# Altium PCB PCB_Kocka_V2.0_ARM.PcbDoc
Units mil, origin at the board's own origin, x right, y up, seen from the top; angles counter-clockwise.
Board outline 1968.5 x 1968.5 mil, 2 copper layers (Top Layer, Bottom Layer); 44 components, 42 nets, 195 pads, 61 vias.
Unrouted connection lines stored in the file: 1.
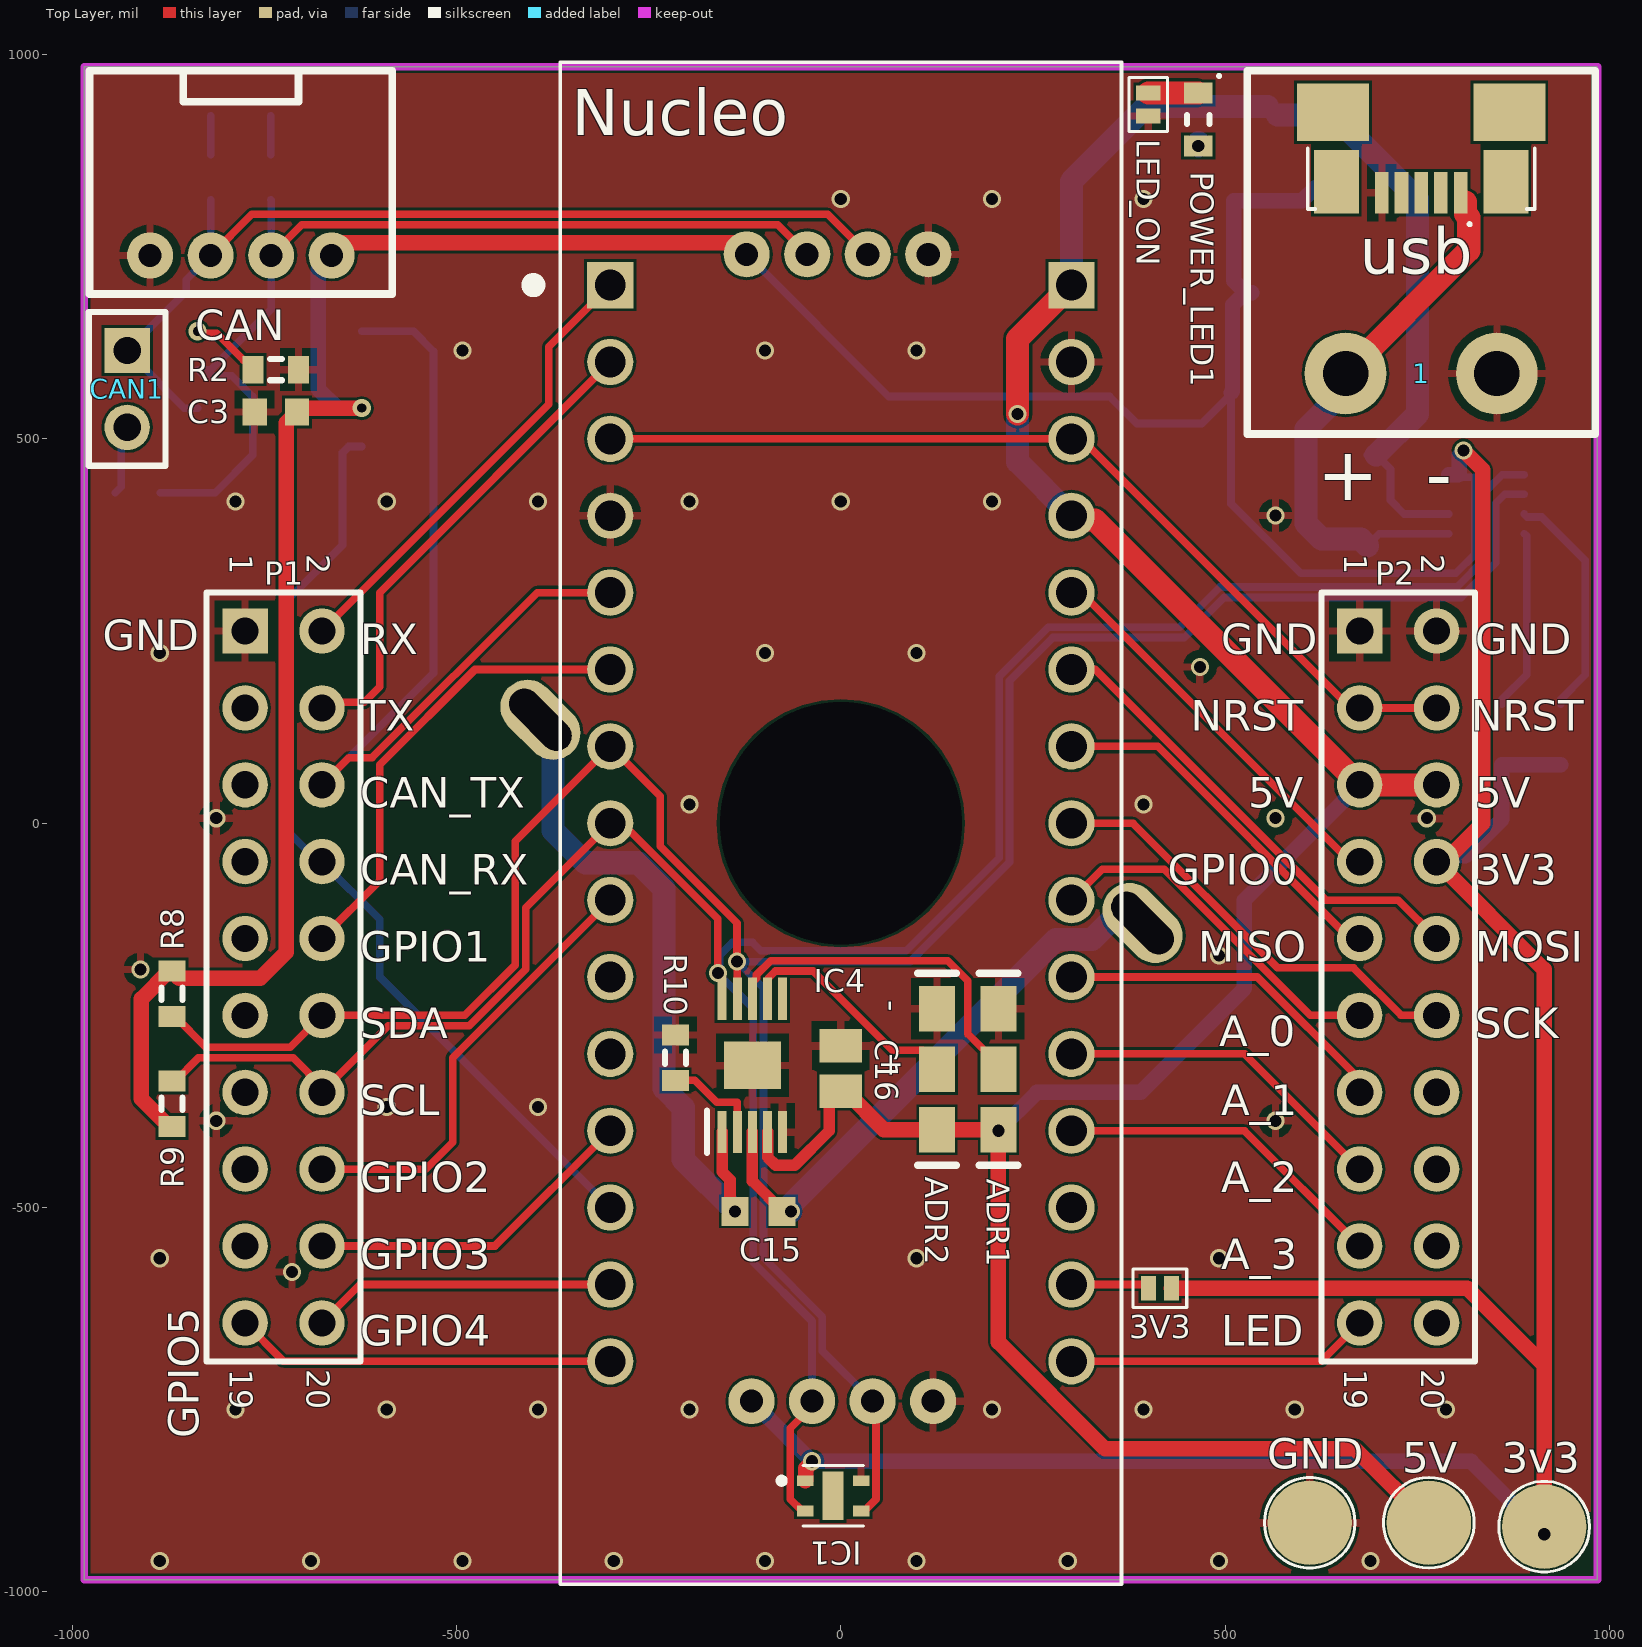
[diagram p0: Top Layer view]
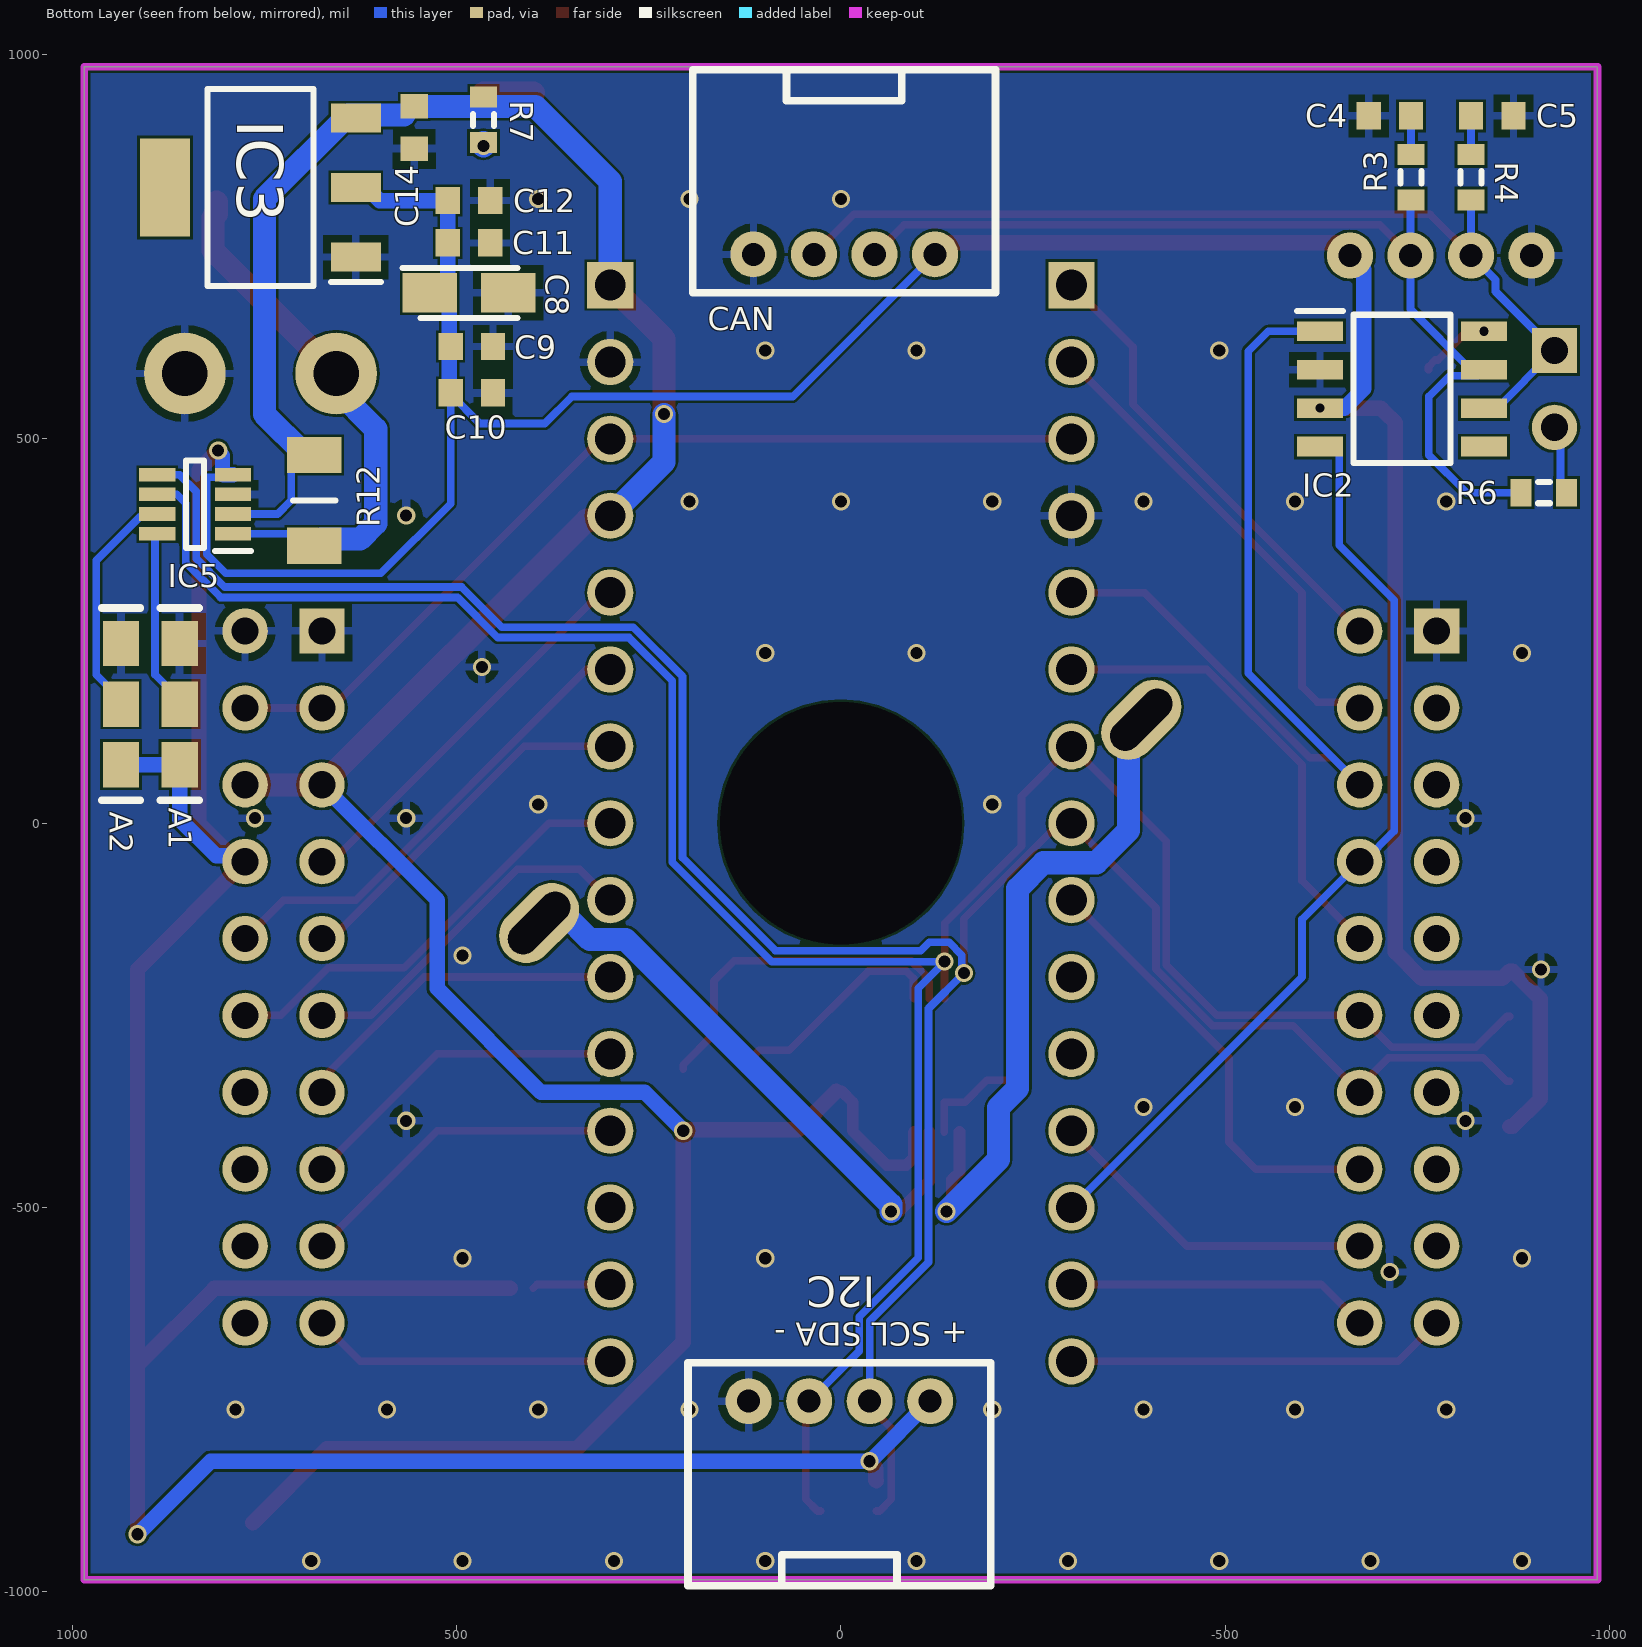
[diagram p1: Bottom Layer view, seen from below]

## Layer stack, top to bottom
Top Solder: solder mask 0.4, Solder Resist, Dk 3.5
Top Layer: signal copper 1.4
Dielectric 1: dielectric 12.6, FR-4, Dk 4.8
Bottom Layer: signal copper 1.4
Bottom Solder: solder mask 0.4, Solder Resist, Dk 3.5

## Board outline
-984.25,-984.25 -984.25,984.25 984.25,984.25 984.25,-984.25

## Design rules (kind name [scope] priority, off if disabled: settings)
Clearance [All] p1: gap=3.5 ignorepadtopadclearanceinfootprint=FALSE except(5: Arc-Via Track-Via)
ComponentClearance [All] p1: gap=7.87 collisioncheckmode=3 verticalgap=10 showdistances=FALSE
HoleSize [All] p1: absolutevalues=TRUE maxlimit=248.03 minlimit=7.87 maxpercent=80.000 minpercent=20.000
HoleToHoleClearance [All] p1: gap=1 allowstackedmicrovias=TRUE
MatchedLengths [All] p1: tolerance=1000 checknetsindiffpair=TRUE checkdiffpairvsdiffpair=FALSE checkxsignals=FALSE checkothers=FALSE
MinimumSolderMaskSliver [All] p1: minsoldermaskwidth=1
PolygonConnect [All] p1: connectstyle=Relief reliefconductorwidth=10 reliefentries=4 polygonreliefangle="90 Angle" airgapwidth=10
RoutingVias [All] p1: holewidth=11.81 width=23.62 viastyle="Through Hole" minholewidth=7.87 minwidth=17.72 maxholewidth=248.03 maxwidth=393.7
SilkToSilkClearance [All] p1: silktosilkclearance=0
SilkToSolderMaskClearance [IsPad] p1: minsilkscreentomaskgap=0 clearancetoexposedcopper=TRUE
SolderMaskExpansion [All] p1: expansion=4
Width [All] p1: maxlimit=500 minlimit=3.5 preferedwidth=10
24 further rules are at their usual default settings.

## Components (designator, comment, footprint, x,y, rotation, side; value= is the part's Value field where it differs from the comment)
1 "CON_2CH_PLUG" CON_2CH_PLUG 755,585 r180 top
3V3 "JMP" JMP 415,-605 r0 top
3v3 "3V3" 1508000150000030 915,-915 r0 top (schematic designator 3V3)
5V "5V" 1508000150000030 765,-910 r90 top
A1 "ADR_PAD" SOLDER_PAD 860,155 r180 bottom
A2 "ADR_PAD" SOLDER_PAD 936.42,155 r180 bottom
ADR1 "ADR_PAD" SOLDER_PAD 205,-320 r180 top
ADR2 "ADR_PAD" SOLDER_PAD 125,-320 r180 top
C3 "0,1uF" 1608[0603] -735,535 r180 top value=100pF
C4 "560pF" 1608[0603] -714.25,920.25 r0 bottom value=100pF
C5 "560pF" 1608[0603] -847.38,920.25 r180 bottom value=100pF
C8 "10uF" CAPPM3216X180N 483.74,690 r180 bottom
C9 "4,7uF" 1608[0603] 480,620 r180 bottom value=100pF
C10 "4,7uF" 1608[0603] 480,560 r180 bottom value=100pF
C11 "4,7uF" 1608[0603] 483.74,755 r180 bottom value=100pF
C12 "4,7uF" 1608[0603] 483.74,810 r180 bottom value=100pF
C14 "100nF" 1608[0603] 555,905 r270 bottom value=100pF
C15 "100nF" Capacitor -107.01,-505 r180 top
C16 "10uF" C0805 0,-319.09 r90 top
CAN "JST-4-ANGLE" JST-4-ANGLE -4.37,740 r180 bottom
CAN "JST-4-ANGLE" JST-4-ANGLE -780.45,738.54 r0 top
CAN1 "Header 2" HDR1X2 -928.37,615 r270 top
GND "5V" 1508000150000030 610,-910 r0 top
I2C "JST-4-ANGLE" JST-4-ANGLE 1.89,-751.82 r0 bottom
IC1 "SHTC3" SHTC3 -25.75,-875 r270 top
IC2 "MCP2551-I_SN" SOIC127P600X175-8N -730,565 r180 bottom
IC3 "LD1117S33TR" SOT230P700X180-4N 755,827 r0 bottom
IC4 "DRV8830DGQR" SOP50P490X110-11N -115,-315 r90 top
IC5 "INA219AIDCNR" SOT65P280X145-8N 840,415 r0 bottom
LED_ON "JMP" JMP 400,935 r90 top
Nucleo "Nucleo_32" Nucleo_32 0,0 r0 top
P1 "Header 10X2" HDR2X10 -775,250 r270 top
P2 "Header 10X2" HDR2X10 675,250 r270 top
POWER_LED1 "LED" LED5mA 465,915.55 r90 top
R2 "4,7K" J1-0603 -735,590 r0 top value=3,3k
R3 "100R" J1-0603 -741.81,840.25 r270 bottom value=3,3k
R4 "100R" J1-0603 -819.82,840.25 r270 bottom value=3,3k
R6 "120R" J1-0603 -914.53,430 r0 bottom value=3,3k
R7 "430R" J1-0603 465,915 r270 bottom
R8 "4K7" J1-0603 -870,-221.92 r90 top value=1K5
R9 "4K7" J1-0603 -870,-365 r270 top value=1K5
R10 "0R2" J1-0603 -215,-305 r270 top
R12 "2mOhm" RESC3216X75N 685,420 r270 bottom
usb "micro USB" "micro USB" 755,925 r180 top

## Footprints (in the part's own frame and the unit in brackets; to place one, negate y for a bottom-side part, rotate by r counter-clockwise, add the part's x,y. Pads: shape width x height; smd on the part's side, far side on the other; paste and mask are expansions set on the pad)
1608[0603] [mm] "Chip Capacitor, Body 1.6x0.8mm, IPC High Density"
  rect 0.8x0.9 smd: 1(-0.7,0) 2(0.7,0)
  body extent -0.87,-0.48 0.87,0.48, height 1.3
1508000150000030 [mil]
  round 110 smd: 1(0,0)
  silkscreen extent -59,-59 59,59
C0805 [mm] "Chip Capacitor, Body 2.0x1.3mm, IPC High Density"
  rect 1.1x1.4 smd: 1(-0.75,0) 2(0.75,0)
  body extent -1.1,-0.72 1.1,0.72, height 1.4
Capacitor [mm]
  rect 0.9x0.95 smd: 1(-0.775,0) 2(0.775,0)
  body extent -0.8,-0.4 0.8,0.4, height 0.5
CAPPM3216X180N [mm]
  rect 1.8x1.3 smd: 1(-1.3,0) 2(1.3,0)
  silkscreen extent -2.2,-0.82 1.6,0.82, body extent -1.6,-0.83 1.6,0.83, height 1.8
CON_2CH_PLUG [mm] "TBG-5.0-KW-2P"
  round 2.7 hole 1.5: 1(-2.5,0) 2(2.5,0)
  silkscreen extent -5.75,-10 5.75,2, body extent -6,-10.1 6,1.91, height 8.5
HDR1X2 [mm] "Connector; Header; 2 Position"
  rect 1.5x1.5 hole 0.9: 1(0,0)
  round 1.5 hole 0.9: 2(2.54,0)
  silkscreen extent -1.27,-1.27 3.81,1.27
HDR2X10 [mm] "Connector; Header; 10x2 Position"
  rect 1.5x1.5 hole 0.9: 1(0,0)
  round 1.5 hole 0.9: 2(0,2.54) 3(2.54,0) 4(2.54,2.54) 5(5.08,0) 6(5.08,2.54) 7(7.62,0) 8(7.62,2.54) 9(10.16,0) 10(10.16,2.54) 11(12.7,0) 12(12.7,2.54) 13(15.24,0) 14(15.24,2.54) 15(17.78,0) 16(17.78,2.54) 17(20.32,0) 18(20.32,2.54) 19(22.86,0) 20(22.86,2.54)
  silkscreen extent -1.27,-1.27 24.13,3.81
J1-0603 [mm] "Chip Resistor, Body 1.6x0.8mm, IPC High Density"
  rect 0.7x0.9 smd: 1(-0.75,0) 2(0.75,0)
  silkscreen extent -0.2,-0.35 0.2,0.35, body extent -0.85,-0.48 0.85,0.48, height 0.9
JMP [mm] "Jumper_solder"
  rect 0.5x0.8 smd: 1(-0.381,0) 2(0.381,0)
  silkscreen extent -0.89,-0.64 0.89,0.64
JST-4-ANGLE [mil] "NXW-04K"
  round 60 hole 30: 1(-118.11,0) 2(-39.37,0) 3(39.37,0) 4(118.11,0)
  silkscreen extent -197,-50 197,240, body extent -195,-55 195,245, height 189
LED5mA [mm]
  rect 0.7x0.95 smd: 1(-0.875,0) 2(0.875,0)
  silkscreen extent -0.15,-0.74 1.49,0.38, body extent -0.8,-0.4 0.8,0.4, height 0.6
"micro USB" [mm]
  rect 0.45x1.38 smd: 1(-1.3,2.66) 2(-0.65,2.66) 3(0,2.66) 4(0.65,2.66) 5(1.3,2.66)
  rect 1.475x2.1 smd: SH1(-2.8,2.3) SH2(2.8,2.3)
  rect 2.375x1.9 smd: SH3(-2.913,0) SH6(2.913,0)
  silkscreen extent -3.75,1.2 3.75,3.75, body extent -3.99,-2.78 3.99,2.65, height 2.69
Nucleo_32 [mm]
  rect 1.53x1.53 hole 1.02: 3.1(-7.62,17.78) 4.1(7.62,17.78)
  round 1.53 hole 1.02: 3.2(-7.62,15.24) 3.3(-7.62,12.7) 3.4(-7.62,10.16) 3.5(-7.62,7.62) 3.6(-7.62,5.08) 3.7(-7.62,2.54) 3.8(-7.62,0) 3.9(-7.62,-2.54) 3.10(-7.62,-5.08) 3.11(-7.62,-7.62) 3.12(-7.62,-10.16) 3.13(-7.62,-12.7) 3.14(-7.62,-15.24) 3.15(-7.62,-17.78) 4.2(7.62,15.24) 4.3(7.62,12.7) 4.4(7.62,10.16) 4.5(7.62,7.62) 4.6(7.62,5.08) 4.7(7.62,2.54) 4.8(7.62,0) 4.9(7.62,-2.54) 4.10(7.62,-5.08) 4.11(7.62,-7.62) 4.12(7.62,-10.16) 4.13(7.62,-12.7) 4.14(7.62,-15.24) 4.15(7.62,-17.78)
  silkscreen extent -10.36,-25.14 9.27,25.14, body extent -9.4,-24.26 9.14,27.75, height 12.57
RESC3216X75N [mm]
  rect 1.2x1.8 smd: 1(-1.5,0) 2(1.5,0)
  silkscreen extent 0,-0.7 0,0.7, body extent -1.6,-0.8 1.6,0.8, height 0.75
SHTC3 [mm]
  rect 0.35x0.55 smd: 1(-0.5,-0.525) 2(0.5,-0.525) 3(0.5,1.325) 4(-0.5,1.325)
  rect 1.6x0.7 smd: 5(0,0.4)
  silkscreen extent -1,-1.4 1,1.4
SOIC127P600X175-8N [mm]
  rect 1.525x0.65 smd: 1(-2.712,1.905) 2(-2.712,0.635) 3(-2.712,-0.635) 4(-2.712,-1.905) 5(2.712,-1.905) 6(2.712,-0.635) 7(2.712,0.635) 8(2.712,1.905)
  silkscreen extent -3.47,-2.45 1.6,2.58, body extent -3,-2.45 3,2.45, height 1.75
SOLDER_PAD [mm]
  rect 1.2x1.5 smd: 1(0,2) 2(0,0) 3(0,-2)
  silkscreen extent -0.64,-3.17 0.64,3.17
SOP50P490X110-11N [mm]
  rect 1.4x0.3 smd: 1(-2.2,1) 2(-2.2,0.5) 3(-2.2,0) 4(-2.2,-0.5) 5(-2.2,-1) 6(2.2,-1) 7(2.2,-0.5) 8(2.2,0) 9(2.2,0.5) 10(2.2,1)
  rect 1.57x1.88 smd: 11(0,0)
  silkscreen extent -2.9,1.5 -1.5,1.5, body extent -2.45,-1.5 2.45,1.5, height 1.1
SOT65P280X145-8N [mm]
  rect 1.2x0.45 smd: 1(-1.25,0.975) 2(-1.25,0.325) 3(-1.25,-0.325) 4(-1.25,-0.975) 5(1.25,-0.975) 6(1.25,-0.325) 7(1.25,0.325) 8(1.25,0.975)
  silkscreen extent -1.85,-1.45 0.3,1.55, body extent -1.4,-1.45 1.4,1.45, height 1.45
SOT230P700X180-4N [mm]
  rect 1.65x0.95 smd: 1(-3.15,2.3) 2(-3.15,0) 3(-3.15,-2.3)
  rect 1.65x3.25 smd: 4(3.15,0)
  silkscreen extent -3.98,-3.25 1.75,3.25, body extent -3.5,-3.25 3.5,3.25, height 1.8

## Part data
1: "TBG-5.0-KW-2P"
3v3 5V GND: library part 5015, "Undefined or Miscellaneous", Manufacturer_Name="Keystone Electronics", Mouser Part Number=534-5015, Allied_Number=70182998, Allied Price/Stock=https://www.alliedelec.com/keystone-electronics-5015/70182998/, Datasheet Link=http://www.keyelco.com/product-pdf.cfm?p=1353, Height=1.52mm, Manufacturer_Part_Number=5015, Mouser Price/Stock=https://www.mouser.com/Search/Refine.aspx?Keyword=534-5015
A1 A2 ADR1 ADR2: "ADR PAD 3 PIN"
C3 C4 C5: library part "Cap Semi", "Capacitor (Semiconductor SIM Model)", LatestRevisionDate=29-May-2009, LatestRevisionNote="IPC-7351 Footprint Added.", PackageDescription="Chip Capacitor", PackageReference=C1206, Published=8-Jun-2000, Publisher="Altium Limited"
C8: library part TAJA106K004RNJ, "Capacitor Polarised", Manufacturer_Name=AVX, Mouser Part Number=581-TAJA106K004R, Datasheet Link=http://www.farnell.com/datasheets/1680476.pdf, Height=1.8mm, Manufacturer_Part_Number=TAJA106K004RNJ, Mouser Price/Stock=https://www.mouser.com/Search/Refine.aspx?Keyword=581-TAJA106K004R
C9 C10 C11 C12 C14: library part "Cap Semi", "Capacitor", LatestRevisionDate=29-May-2009, LatestRevisionNote="IPC-7351 Footprint Added.", PackageDescription="Chip Capacitor", PackageReference=C1206, Published=8-Jun-2000, Publisher="Altium Limited"
C15: library part Cap
C16: library part "Cap Pol3", "Polarized Capacitor (Surface Mount)", LatestRevisionDate=29-May-2009, LatestRevisionNote="IPC-7351 Footprint Added.", PackageDescription="Chip Capacitor", PackageReference=C0805, Published=8-Jun-2000, Publisher="Altium Limited"
CAN CAN I2C: "NXW-04K"
CAN1: "Header, 2-Pin", LatestRevisionDate=17-Jul-2002, LatestRevisionNote="Re-released for DXP Platform.", Publisher="Altium Limited"
IC1: "Integrated Circuit", Manufacturer_Name=Sensirion, Mouser Part Number=403-SHTC3, Datasheet Link=https://www.glynshop.com/erp/owweb/Daten/Datenblaetter/Sensirion/SHTC3.pdf, Height=0mm, Manufacturer_Part_Number=SHTC3, Mouser Price/Stock=https://www.mouser.com/Search/Refine.aspx?Keyword=403-SHTC3
IC2: "Integrated Circuit", Manufacturer_Name=Microchip, Manufacturer_Part_Number=MCP2551-I/SN, Mouser Part Number=579-MCP2551-I/SN, RS Part Number=0402904P, Allied_Number=70045403, Allied Price/Stock=http://www.alliedelec.com/microchip-technology-inc-mcp2551-i-sn/70045403/, Datasheet Link=http://docs-emea.rs-online.com/webdocs/0a78/0900766b80a78cdb.pdf, Height=1.75mm, Mouser Price/Stock=https://www.mouser.com/Search/Refine.aspx?Keyword=579-MCP2551-I%2FSN, RS Price/Stock=http://uk.rs-online.com/web/p/products/0402904P
IC3: "Integrated Circuit", Manufacturer_Name=STMicroelectronics, Mouser Part Number=511-LD1117S33, RS Part Number=7140697P, Allied_Number=70390201, Allied Price/Stock=http://www.alliedelec.com/stmicroelectronics-ld1117s33tr/70390201/, Datasheet Link=http://www.st.com/st-web-ui/static/active/en/resource/technical/document/datasheet/CD00000544.pdf, Height=1.8mm, Manufacturer_Part_Number=LD1117S33TR, Mouser Price/Stock=https://www.mouser.com/Search/Refine.aspx?Keyword=511-LD1117S33, RS Price/Stock=http://uk.rs-online.com/web/p/products/7140697P
IC4: "Integrated Circuit", Manufacturer_Name="Texas Instruments", Mouser Part Number=595-DRV8830DGQR, RS Part Number=1626149, Datasheet Link=http://www.ti.com/lit/ds/symlink/drv8830.pdf, Height=1.1mm, Manufacturer_Part_Number=DRV8830DGQR, Mouser Price/Stock=https://www.mouser.com/Search/Refine.aspx?Keyword=595-DRV8830DGQR, RS Price/Stock=http://uk.rs-online.com/web/p/products/1626149
IC5: library part INA219BIDCNR, "Integrated Circuit", Manufacturer_Name="Texas Instruments", Mouser Part Number=595-INA219BIDCNR, Datasheet Link=http://www.ti.com/lit/ds/symlink/ina219.pdf, Height=1.45mm, Manufacturer_Part_Number=INA219BIDCNR, Mouser Price/Stock=https://www.mouser.com/Search/Refine.aspx?Keyword=595-INA219BIDCNR
P1 P2: "Header, 10-Pin, Dual row", LatestRevisionDate=17-Jul-2002, LatestRevisionNote="Re-released for DXP Platform.", Publisher="Altium Limited"
R2 R3 R4 R6 R7 R8 R9 R10 R12: library part Res3, "Resistor", LatestRevisionDate=29-May-2009, LatestRevisionNote="IPC-7351 Footprint Added.", PackageDescription="Chip Resistor", PackageReference=J1-0603, Published=8-Jun-2000, Publisher="Altium Limited"

## Free pads (board coordinates)
  round 60 hole 314.96: 8(0,0)
  oval 118.11x70.87 hole 39.37 slot 98.43 at 135 deg rot 135: ""(-390.86,134.59) ""(392.48,-129.8)

## Via types
v1: diameter 23.62, hole 15.75, Top Layer to Bottom Layer, tented both sides, 59 vias
v2: diameter 23.62, hole 11.81, Top Layer to Bottom Layer, tented both sides, 2 vias

## Nets (pads, with @x,y where several pads share a name; then routed paths per layer and width w, separated by ;. In a path a pad name is that pad's centre, name@x,y a point inside that pad or via, vN(x,y) a via of type N, cw(c..) or ccw(c..) an arc to the next point about the centre after c; other vN are vias at no path point)
3V3: 3v3.1 3V3.2 A1.3 A2.3 C3.1 C8.1 C9.1 C10.1 C11.1 C12.1 CAN.4 I2C.1 IC1.1 IC2.3 IC3.2 IC5.4 P2.8 R8.2 R9.2 | length 7255
  Top Layer w20: R9.2 -873.94,-394.53 -910,-358.46 -910,-228.46 -873.94,-192.39 R8.2 -860.71,-201.68 -755.46,-201.68 -721.41,-167.63 -721.41,521.03 C3.1 -702.44,540 v2(-623.23,540) ; CAN.4@-662.34,738.54 -645.89,755 -137.48,755 CAN.4@-122.48,740 ; IC1.1 -45.59,-854.49 -45.59,-839.09 -37.48,-830.98 v1(-37.48,-830) ; 3V3.2 815,-605 915,-705 ; v1(810,485) 835,460 835,-0.41 785.41,-50 P2.8 915,-190 915,-705 ; 3v3.1 915,-705
  Bottom Layer w10: CAN.4@-122.48,740 62.52,555 350,555 385,520 469.53,520 C10.1@507.56,558.03 ; C10.1 C10.1@507.56,558.03 ; IC5.4 794.17,450 825,450 825,350 800,325 598.35,325 507.56,415.79 C10.1@507.56,558.03
  Bottom Layer w20: CAN.4@-662.34,738.54 -680,720.89 -680,565 -655,540 v2(-623.23,540) ; I2C.1 -115.94,-751.82 -37.76,-830 v1(-37.48,-830) 820,-830 v1(915,-925) ; C10.1 509.49,561.93 509.49,674.41 525.08,690 C8.1@526.89,690 ; C8.1 C8.1@526.89,690 ; IC3.2 617.2,827 600.2,810 C12.1 C11.1 511.3,705.59 C8.1@526.89,690 ; P2.8@785.57,-50 P2.8 782.47,-42.53 812.47,-42.53 860,5 A1.3 A2.3 ; IC5.4 803.27,453.39 804.41,454.53 804.41,478.43 810,484.02 v1(810,485)
5V: 5V.1 ADR1.1 ADR2.1 C14.1 C16.1 IC3.3 IC4.4 IC5.2 Nucleo.4.1 Nucleo.4.4 P2.5 P2.6 R7.1 R12.1 | length 4229.1
  Top Layer w15: IC4.4 -95.04,-401.89 -95.04,-434.77 -84.8,-445 -60,-445 -15.28,-400.28 -15.28,-362.78 -1.12,-348.62 C16.1 C16.1@5.91,-348.62
  Top Layer w20: C16.1@5.91,-348.62 56.02,-398.74 ADR2.1 ADR1.1 v1(205,-400) 205,-675 343.89,-813.89 668.89,-813.89 5V.1
  Top Layer w30: v1(230,532.24) 230,630 Nucleo.4.1 ; Nucleo.4.4 305.79,394.21 330.79,394.21 P2.5 P2.6
  Bottom Layer w10: R12.1 696.38,479.06 715,460.43 715,420 732.8,402.2 IC5.2
  Bottom Layer w20: v1(205,-400) 255,-350 390,-350 525,-215 525,-100 P2.5
  Bottom Layer w30: v1@230,531.5 230,470 Nucleo.4.4 ; Nucleo.4.1 300,835 397.56,932.56 C14.1 ; C14.1@568.28,921.25 641.06,921.25 750,812.32 750,532.24 696.81,479.06 R12.1@696.38,479.06
+5_MER+: 1.2 IC5.1 R12.2 usb.1 | length 712
  Top Layer w30: 1.2 816.81,745.24 816.81,788.18 812.32,792.66 usb.1@812.32,808.11
  Bottom Layer w10: R12.2 700.67,376.61 IC5.1
  Bottom Layer w30: 1.2 656.57,564.35 605,512.78 605,390 625.43,369.57 676.38,369.57 R12.2
ADR0: A2.2 IC5.7 | length 304.4
  Bottom Layer w10: IC5.7 893.07,398.35 911.98,398.35 968.55,341.78 968.55,193.03 936.42,160.91 A2.2
ADR1: A1.2 IC5.8 | length 236.1
  Bottom Layer w10: A1.2 860,160.91 892.12,193.03 892.12,373.7 IC5.8
adresa1: ADR1.2 IC4.8 | length 458.1
  Top Layer w10: IC4.8 -115,-206.73 -109.72,-201.45 -109.72,-197.31 -91.24,-178.83 138.83,-178.83 165,-205 165,-274.09 205,-314.09 ADR1.2
adresa2: ADR2.2 IC4.7 | length 306.7
  Top Layer w10: IC4.7 -94.41,-227.48 -94.41,-201.68 -85.06,-192.33 -36.01,-192.33 67.14,-295.47 106.38,-295.47 125,-314.09 ADR2.2
Analog0: Nucleo.4.9 P2.11 | length 470.3
  Top Layer w10: Nucleo.4.9 340,-60 420.91,-60 610.91,-250 P2.11
Analog1: Nucleo.4.10 P2.13 | length 447
  Top Layer w10: Nucleo.4.10 541.82,-200 675,-333.18 P2.13
Analog2: Nucleo.4.11 P2.15 | length 437.1
  Top Layer w10: Nucleo.4.11 525,-300 P2.15
Analog3: Nucleo.4.12 P2.17 | length 444.4
  Top Layer w10: Nucleo.4.12 525,-400 P2.17 ; P2.17@659.88,-560.12 P2.17@665,-555
CAN_RX: IC2.4 Nucleo.3.13 P1.8 | length 1217.1
  Bottom Layer w10: IC2.4 -640.45,490 -648.25,482.2 -648.25,361.75 -720,290 -720,-10 -680,-50 P1.8 -600,-125 -600,-200 Nucleo.3.13
CAN_TX: IC2.1 Nucleo.3.5 P1.6 | length 1206.7
  Top Layer w10: P1.6 -640,85 -610,85 -395,300 Nucleo.3.5
  Bottom Layer w10: P1.6 -530,195 -530,614.14 -555.86,640 IC2.1
CANH: CAN.3 IC2.7 R3.2 R6.2 | length 1303.1
  Top Layer w10: CAN.3@-741.08,738.54 -701.13,778.5 -82.24,778.5 CAN.3@-43.74,740
  Bottom Layer w10: R6.2 -814.06,430 -765,479.06 -765,555 -792.2,582.2 -828.98,582.2 IC2.7 -819.55,590 -741.08,668.46 -741.08,738.54 -741.08,810 R3.2
CANL: CAN1.1 CAN.2 IC2.6 R4.2 | length 1262.2
  Top Layer w10: CAN.2@-819.82,738.54 -766.37,792 -17,792 CAN.2@35,740
  Bottom Layer w10: IC2.6 -854,540 -889.7,575.7 -889.7,576.33 CAN1.1 -851.64,691.72 -851.64,706.72 -819.82,738.54 R4.2
cerpadlo+: C15.2 IC4.1 pad.@-390.86,134.59 | length 895.2
  Top Layer w15: IC4.1 -154.37,-453.62 -144.19,-463.8 -144.19,-498.33 v1(-137.52,-505)
  Bottom Layer w30: pad.@-390.86,134.59 -374.16,117.88 -374.16,-9.65 -332.43,-51.38 -263.62,-51.38 -230,-85 -230,-345 -205,-370 -205,-437.52 v1(-137.52,-505)
cerpadlo-: C15.1 IC4.3 pad.@392.48,-129.8 | length 756.2
  Top Layer w15: IC4.3 -115,-465.51 -76.5,-504.02 C15.1 v1(-65,-505)
  Bottom Layer w30: v1(-65,-505) -65,-496.24 279.86,-151.38 326.43,-151.38 356.9,-120.92 383.59,-120.92 pad.@392.48,-129.8
GND: 1.1 A1.1 A2.1 ADR1.3 ADR2.3 C3.2 C4.2 C5.2 C8.2 C9.2 C10.2 C11.2 C12.2 C14.2 C16.2 CAN.1 GND.1 I2C.4 IC1.4 IC2.2 IC3.1 IC4.5 IC4.11 IC5.3 LED_ON.1 Nucleo.3.4 Nucleo.4.2 P1.1 P2.1 P2.2 R2.2 R10.1 usb.5
  other v1: -885.94,-959.65 -689.09,-959.65 -492.24,-959.65 -295.39,-959.65 -98.54,-959.65 98.31,-959.65 295.16,-959.65 492.01,-959.65 688.86,-959.65 -787.52,-762.8 -590.67,-762.8 -393.82,-762.8 -196.97,-762.8 196.73,-762.8 393.58,-762.8 590.43,-762.8 787.28,-762.8 -714.09,-583.99 -885.94,-565.94 98.31,-565.94 492.01,-565.94 -812.52,-387.14 565.43,-387.14 -590.67,-369.09 -393.82,-369.09 -910.94,-190.29 492.01,-172.24 -812.52,6.56 565.43,6.56 762.28,6.56 -196.97,24.61 393.58,24.61 467.01,203.41 -885.94,221.46 -98.54,221.46 98.31,221.46 565.43,400.26 -787.52,418.31 -590.67,418.31 -393.82,418.31 -196.97,418.31 -0.12,418.31 196.73,418.31 -492.24,615.16 -98.54,615.16 98.31,615.16 -0.12,812.01 196.73,812.01 393.58,812.01
GPIO0: Nucleo.4.5 P2.7 | length 520
  Top Layer w10: Nucleo.4.5 312.5,300 662.5,-50 P2.7
GPIO1: Nucleo.3.6 P1.10 | length 608.4
  Top Layer w10: P1.10 -600,-75 -600,75.91 -475.91,200 Nucleo.3.6
GPIO2: Nucleo.3.9 P1.16 | length 584.4
  Top Layer w10: P1.16 -540,-450 -505,-415 -505,-305 Nucleo.3.9
GPIO3: Nucleo.3.12 P1.18 | length 451.1
  Top Layer w10: P1.18@-690,-555 P1.18@-676.02,-555 ; P1.18 -450,-550 Nucleo.3.12
GPIO4: Nucleo.3.14 P1.20 | length 395.7
  Top Layer w10: P1.20 -625,-600 Nucleo.3.14
GPIO5: Nucleo.3.15 P1.19 | length 495.7
  Top Layer w10: P1.19 -725,-700 Nucleo.3.15
LED_MCU: Nucleo.4.15 P2.19 | length 395.7
  Top Layer w10: Nucleo.4.15 625,-700 P2.19
MISO: Nucleo.4.7 P2.9 | length 478.6
  Top Layer w10: Nucleo.4.7 412.03,100 662.03,-150 P2.9
MOSI: Nucleo.4.6 P2.10 | length 620
  Top Layer w10: Nucleo.4.6 331.12,200 631.12,-100 725,-100 P2.10
NC: Nucleo.3.10 Nucleo.3.11
Net3V3_1: 3V3.1 Nucleo.4.14 | length 102.2
  Top Layer w10: Nucleo.4.14 395.16,-600 400,-604.84 3V3.1
NetC4_1: C4.1 R3.1 | length 50.5
  Bottom Layer w10: R3.1 C4.1
NetC5_1: C5.1 R4.1 | length 50.5
  Bottom Layer w10: R4.1 C5.1
NetCAN1_2: CAN1.2 R6.1 | length 91.5
  Bottom Layer w10: R6.1 -936.21,437.84 -936.21,507.16 CAN1.2
NetIC2_8: IC2.8 R2.1 | length 95.3
  Top Layer w10: v2(-836.77,640) -834.17,637.39 -811.92,637.39 -777.24,602.72 -773.31,602.72 -764.53,593.94 R2.1
NetIC4_2: IC4.2 R10.2 | length 130.8
  Top Layer w10: R10.2 -189.88,-334.53 -161.57,-362.83 -134.68,-362.83 IC4.2
NetLED_ON_2: LED_ON.2 POWER_LED1.2 | length 65
  Top Layer w30: LED_ON.2 POWER_LED1.2
NetPOWER_LED1_1: POWER_LED1.1 R7.2 | length 4.4
  Bottom Layer w30: v1(465,881.1) R7.2
NRST: Nucleo.3.3 Nucleo.4.3 P2.3 P2.4 | length 1220
  Top Layer w10: Nucleo.3.3 Nucleo.4.3 312.5,500 662.5,150 P2.3 P2.4
RX_wireless_1: Nucleo.3.1 P1.2 | length 605.3
  Top Layer w10: P1.2 -380,545 -380,620 Nucleo.3.1
SCK: Nucleo.4.8 P2.12 | length 578.6
  Top Layer w10: Nucleo.4.8 380,0 568.03,-188.03 666.81,-188.03 728.78,-250 P2.12
SCL: I2C.2 IC1.2 IC4.10 IC5.5 Nucleo.3.8 P1.14 R9.1 | length 3360.6
  Top Layer w10: R9.1 -866.06,-335.47 -835.59,-305 -712.44,-305 -675,-342.44 P1.14 -588.5,-263.5 -483.5,-263.5 -410,-190 -410,-110 Nucleo.3.8 -284.09,0 -160,-124.09 v1(-160,-195) ; IC1.2 -50.35,-894.68 -65.74,-879.3 -65.74,-787.19 -37.48,-758.93 I2C.2
  Bottom Layer w10: I2C.2 -37.48,-647.52 -114.02,-570.98 -114.02,-240.98 v1(-160,-195) -157.39,-192.39 -157.39,-171.55 -140.85,-155 -115,-155 -104.02,-165.98 84.93,-165.98 205.91,-45 205.91,190.91 270,255 440.91,255 493.11,307.2 801.3,307.2 838.5,344.41 838.5,431.5 860.39,453.39 IC5.5
SDA: I2C.3 IC1.3 IC4.9 IC5.6 Nucleo.3.7 P1.12 R8.1 | length 3499.1
  Top Layer w10: R8.1 -866.06,-251.45 -826.01,-291.5 -716.5,-291.5 P1.12 -489.09,-250 -423.5,-184.41 -423.5,-23.5 Nucleo.3.7 -235,35 -235,-30 -135,-130 v1(-135,-180) -134.84,-180.16 -134.84,-228.23 IC4.9 ; IC1.3 30.35,-894.68 45.74,-879.3 45.74,-756.3 I2C.3
  Bottom Layer w10: I2C.3 -23.98,-686.58 -23.98,-641.93 -100.52,-565.39 -100.52,-214.48 v1(-135,-180) 90,-180 219.41,-50.59 219.41,185.32 275.59,241.5 446.5,241.5 498.7,293.7 806.89,293.7 852,338.82 852,415.99 863.8,427.8 IC5.6
TX_wireless_1: Nucleo.3.2 P1.4 | length 633.2
  Top Layer w10: P1.4 -667.81,157.19 -620.19,157.19 -600,177.38 -600,300 Nucleo.3.2
pads on no net: IC1.5 IC2.5 IC3.4 IC4.6 Nucleo.4.13 P1.3 P1.5 P1.7 P1.9 P1.11 P1.13 P1.15 P1.17 P2.14 P2.16 P2.18 P2.20 usb.2 usb.3 usb.4 usb.SH1 usb.SH2 usb.SH3 usb.SH6

## Polygon pours and split planes (outlines as drawn)
GND on Bottom Layer "GND_Bottom" (solid, remove dead copper, pour order 0): -984.25,-984.25 -984.25,984.25 984.25,984.25 984.25,-984.25
GND on Top Layer "GND_Top" (solid, remove dead copper, pour order 2): -984.25,-984.25 -984.25,984.25 984.25,984.25 984.25,-984.25

## Keep-outs
Keep-Out Layer:
  the board outline again, w10

## Silkscreen, mask and mechanical layers (free items; w line width, h text height)
Top Overlay:
  text "+  -" at 620,420 h70
  text "GND" at -960,225 h40
  text "RX" at -625,220 h40
  text "GND" at 495,220 h40
  text "GND" at 825,220 h40
  text "TX" at -625,120 h40
  text "NRST" at 455,120 h40
  text "NRST" at 820,120 h40
  text "CAN_TX" at -625,20 h40
  text "5V" at 530,20 h40
  text "5V" at 825,20 h40
  text "CAN_RX" at -625,-80 h40
  text "GPIO0" at 425,-80 h40
  text "3V3" at 825,-80 h40
  text "GPIO1" at -625,-180 h40
  text "MISO" at 465,-180 h40
  text "MOSI" at 825,-180 h40
  text "-    +" at 52.61,-230 h30 r270
  text "SDA" at -625,-280 h40
  text "SCK" at 825,-280 h40
  text "A_0" at 492.01,-290 h40
  text "SCL" at -625,-380 h40
  text "A_1" at 495,-380 h40
  text "GPIO2" at -625,-480 h40
  text "A_2" at 495,-480 h40
  text "GPIO3" at -625,-580 h40
  text "A_3" at 495,-580 h40
  text "GPIO4" at -625,-680 h40
  text "LED" at 495,-680 h40
  text "GPIO5" at -835,-800 h40 r90
Bottom Overlay:
  text "+ SCL SDA -" at -165,-650 h30 r180
Mechanical 15:
  circle w10: c5,10 r629.92

## Text inside footprints (layer, text, board x,y; h text height)
P1: Top Overlay "2" at -695,350 h30 r270; Top Overlay "1" at -795,350 h30 r270; Top Overlay "19" at -795,-710 h30 r270; Top Overlay "20" at -695,-710 h30 r270
P2: Top Overlay "2" at 755,350 h30 r270; Top Overlay "1" at 655,350 h30 r270; Top Overlay "19" at 655,-710 h30 r270; Top Overlay "20" at 755,-710 h30 r270
usb: Mechanical 1 "PCB EDGE" at 995,1070 h73.82 r180